# Altium PCB ISO.PcbDoc
Units mil, origin at the board's own origin, x right, y up, seen from the top; angles counter-clockwise.
Board outline 1889.76 x 1259.84 mil, 2 copper layers (Top Layer, Bottom Layer), stack 12.8 mil thick; 43 components, 25 nets, 112 pads, 358 vias.
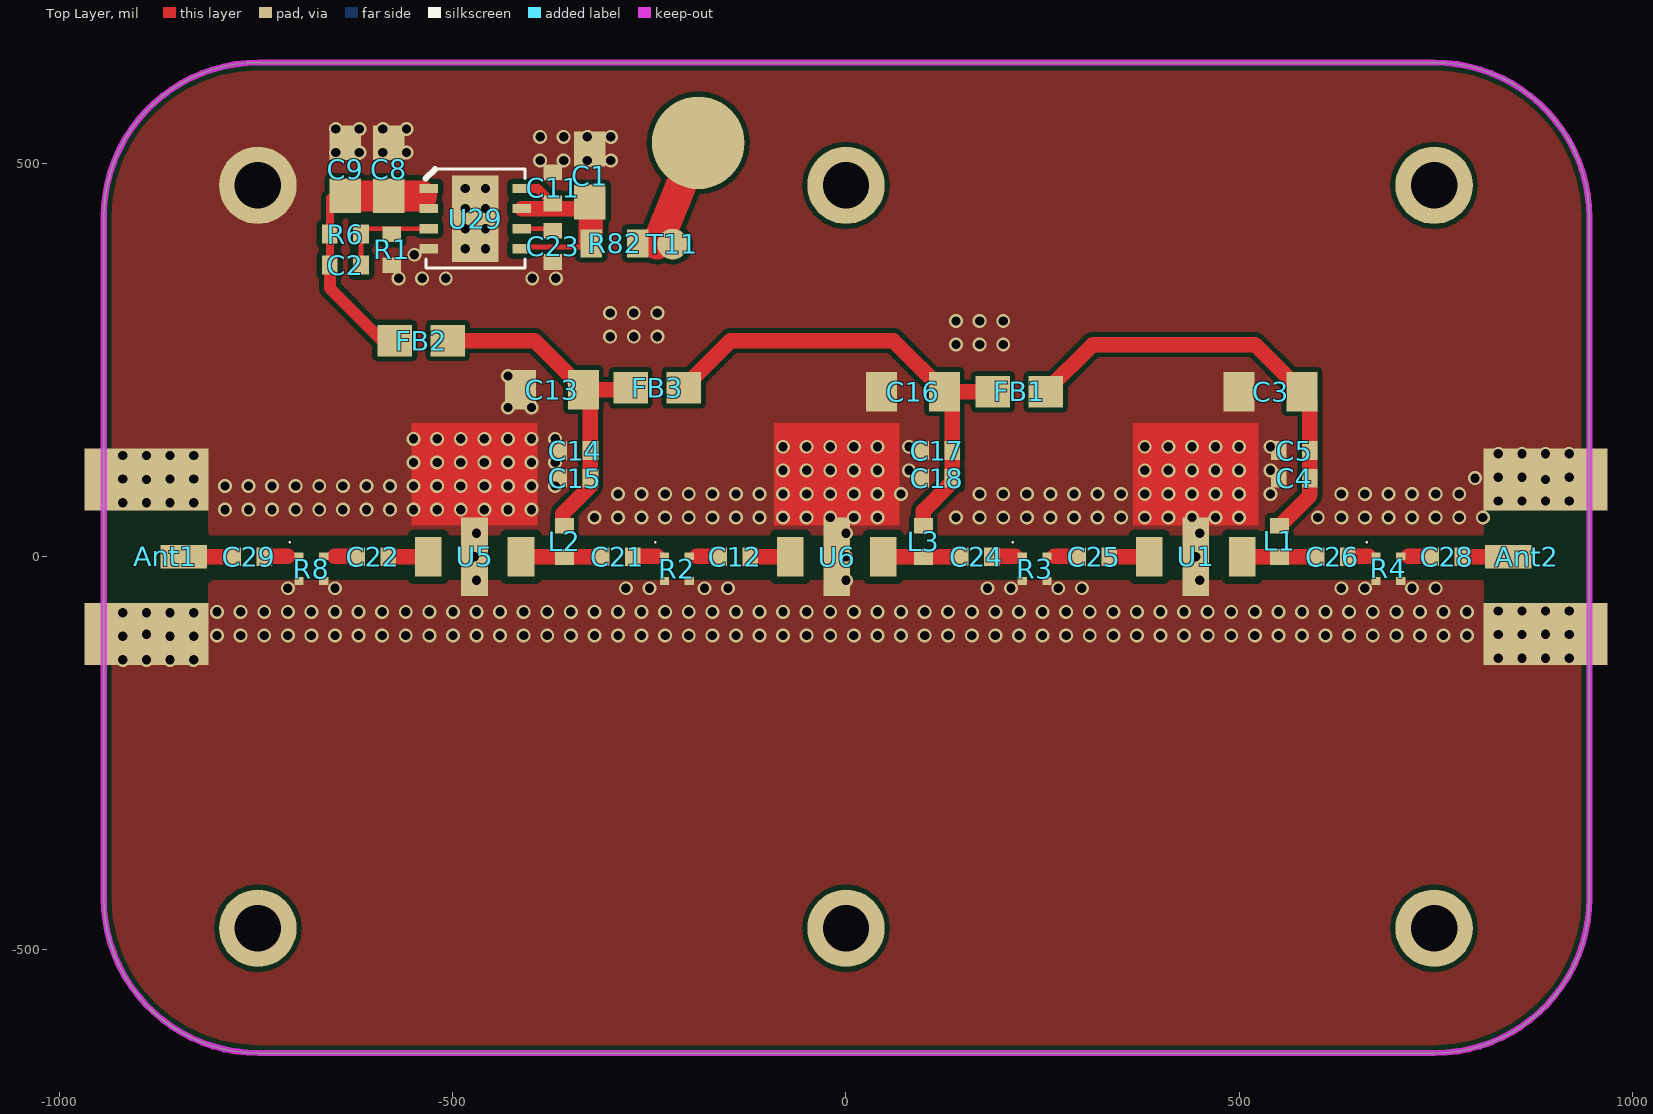
[diagram p0: Top Layer view]
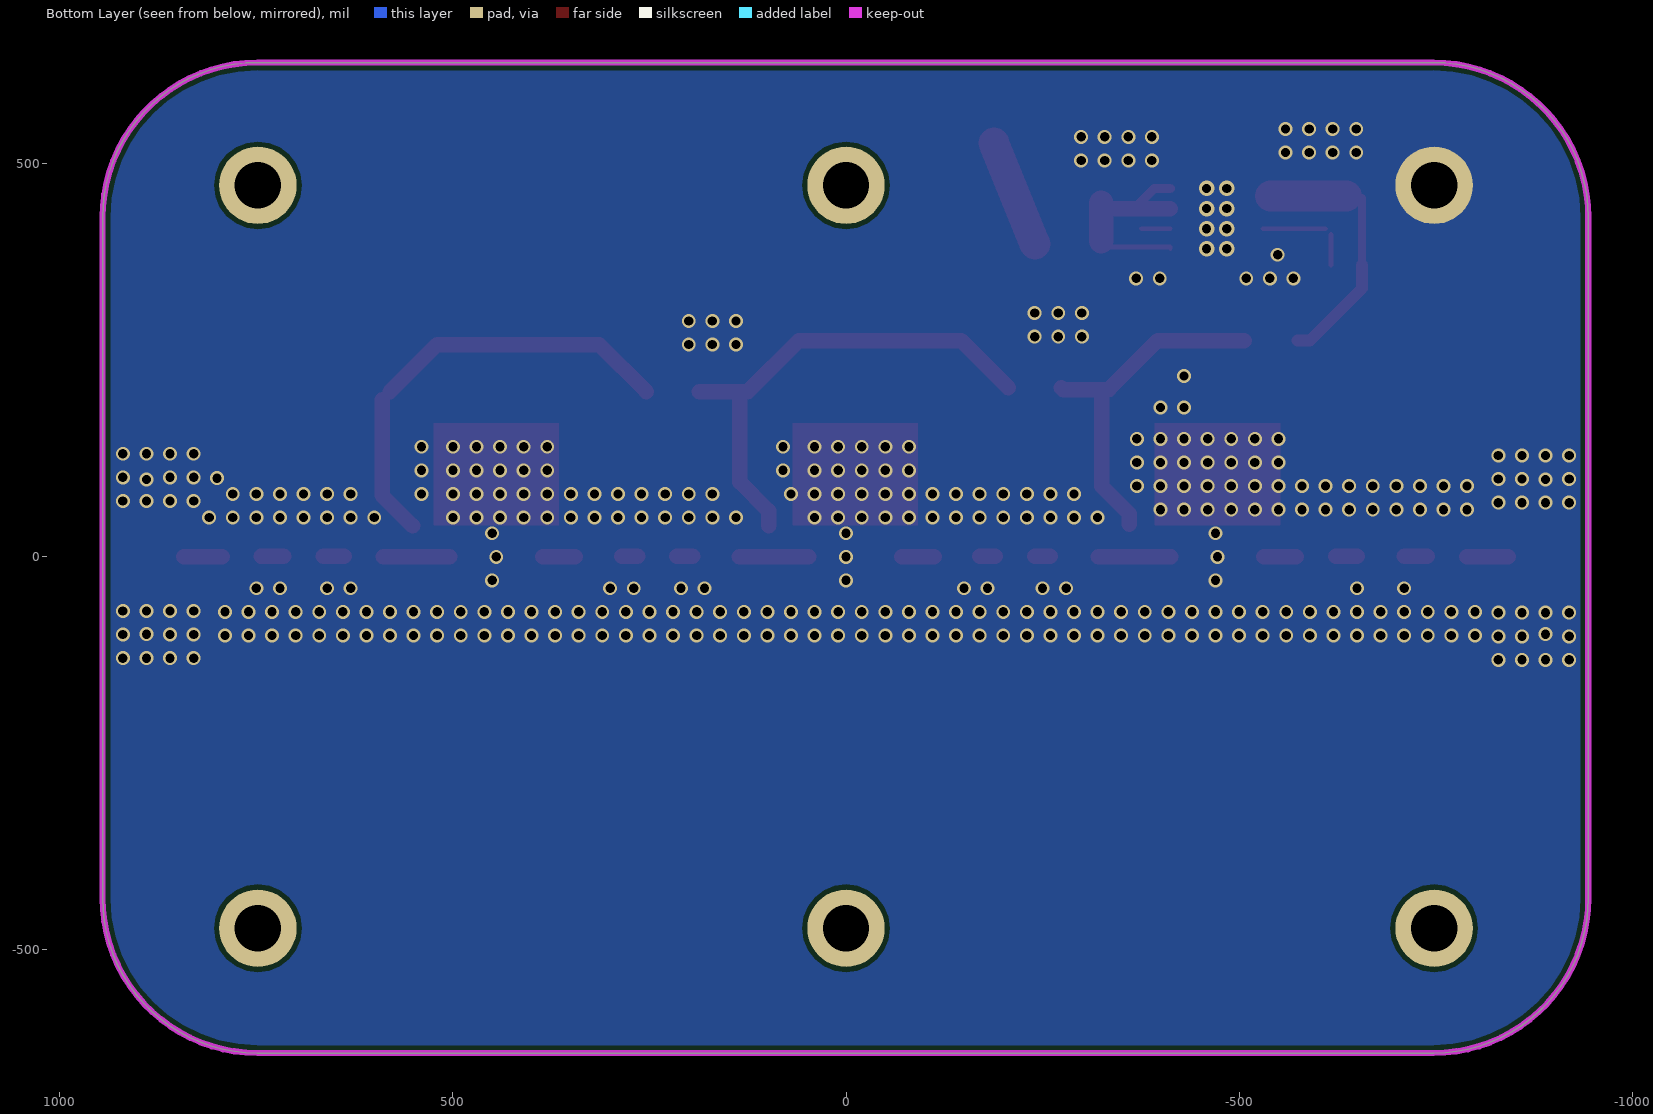
[diagram p1: Bottom Layer view, seen from below]

## Layer stack, top to bottom
Top Solder: solder mask 0.4, Solder Resist, Dk 3.5
Top Layer: signal copper 1.4
Dielectric 1: core 10, FR-4, Dk 4.2
Bottom Layer: signal copper 1.4
Bottom Solder: solder mask 0.4, Solder Resist, Dk 3.5

## Board outline
-944.21,-434.35 -944.21,431.79 cw(c-747.36,431.79) -747.36,628.64 748.7,628.64 cw(c748.7,431.79) 945.55,431.79 945.55,-434.35 cw(c748.7,-434.35) 748.7,-631.2 -747.36,-631.2 cw(c-747.36,-434.35)

## Design rules (kind name [scope] priority, off if disabled: settings)
Clearance 50R [InNetClass('50R') vs InNet('GND')] p1: gap=10 ignorepadtopadclearanceinfootprint=FALSE
Clearance Clearance_1 [(InNamedPolygon('Bottom Layer-No Net')) vs Not InNet('GND')] p2: gap=6 ignorepadtopadclearanceinfootprint=FALSE
Clearance [All] p3: gap=6 ignorepadtopadclearanceinfootprint=FALSE except(0: Arc-Hole Track-Hole SMDPad-Hole THPad-Hole Via-Hole Fill-Hole Poly-Hole Region-Hole Text-Hole)
DiffPairsRouting [All] p1: maxlimit=10 minlimit=10 mostfreqgap=10 toplayer_minwidth=5.98 toplayer_maxwidth=15 toplayer_prefwidth=15 bottomlayer_minwidth=5.98 bottomlayer_maxwidth=15 bottomlayer_prefwidth=15 maxuncoupledlength=500
HoleSize [All] p1: absolutevalues=TRUE maxlimit=120 minlimit=1 maxpercent=80.000 minpercent=20.000
MinimumSolderMaskSliver [All] p1 off: minsoldermaskwidth=10
PlaneClearance [All] p1: clearance=10
PlaneConnect [All] p1: planeconnectstyle=Direct reliefexpansion=20 reliefentries=4 reliefconductorwidth=10 reliefairgap=10
PolygonConnect [All] p1: connectstyle=Direct reliefconductorwidth=10 reliefentries=4 polygonreliefangle="90 Angle" airgapwidth=10
RoomDefinition main [InComponentClass('main')] p1 off: confinementstyle=ConfineIn formatcopy=TRUE lockcomponents=FALSE outline -7200.19,-1795.5 -4855.19,-1795.5 -4855.19,-1555.5 -7200.19,-1555.5
RoutingVias [All] p1: holewidth=12 width=20 viastyle="Through Hole" minholewidth=11.81 minwidth=19.68 maxholewidth=28 maxwidth=50
SilkToBoardRegionClearance [All] p1 off:
SilkToSilkClearance [All] p1 off: silktosilkclearance=10
SilkToSolderMaskClearance [IsPad] p1 off: minsilkscreentomaskgap=10 clearancetoexposedcopper=TRUE
SolderMaskExpansion [All] p1: expansion=4
Width [All] p1: maxlimit=60 minlimit=6 preferedwidth=6
22 further rules are at their usual default settings.

## Classes and differential pairs
net class 50R: AMP2 NetAnt1_1 NetAnt2_1 NetC12_1 NetC12_2 NetC21_1 NetC21_2 NetC22_2 NetC24_2 NetC25_1 NetC25_2 NetC26_1 NetC26_2 NetC28_1

## Components (designator, comment, footprint, x,y, rotation, side; value= is the part's Value field where it differs from the comment)
Ant1 "Antenna" SMA-2 -889.76,98.43 r270 top
Ant2 "Antenna" SMA-2 889.76,-98.43 r90 top
C1 "2.2uF" 0603 -325.79,485.24 r270 top
C2 "470nF" 0402 -636.81,371.06 r0 top
C3 "12nF" 0805 540,210 r0 top
C4 "1nF" 0402 570,100 r0 top
C5 "100pF" 0402 570,135 r0 top
C8 "0.1uF" 0603 -581.69,493.11 r270 top
C9 "2.2uF" 0603 -636.81,493.11 r270 top
C11 "0.1uF" 0402 -373.03,469.49 r270 top
C12 "1nF" 0402 -141.73,0 r0 top
C13 "12nF" 0805 -374.02,212.6 r0 top
C14 "1nF" 0402 -345,135 r0 top
C15 "100pF" 0402 -345,100 r0 top
C16 "12nF" 0805 85,210 r0 top
C17 "1nF" 0402 115,135 r0 top
C18 "100pF" 0402 115,100 r0 top
C21 "1nF" 0402 -291.34,0 r0 top
C22 "1nF" 0402 -602.36,0 r0 top
C23 "470nF" 0402 -373.03,394.69 r90 top
C24 "1nF" 0402 165.35,0 r0 top
C25 "1nF" 0402 314.96,0 r0 top
C26 "1nF" 0402 618.11,0 r0 top
C28 "1nF" 0402 763.78,0 r0 top
C29 "1nF" 0402 -759.84,0 r0 top
FB1 "FB" 0603 220,210 r0 top
FB2 "FB" 0603 -540,275 r180 top
FB3 "FB" 0603 -240,215 r180 top
L1 "Inductor" 0402 551.18,19.69 r270 top value=10nH
L2 "Inductor" 0402 -358.27,19.69 r270 top value=10nH
L3 "Inductor" 0402 98.43,19.69 r270 top value=10nH
R1 "10k" 0402 -577.76,390.75 r270 top value=0Ohm
R2 "EXB24-RF-ATT" EXB24AT-RF-ATT -215,-15 r0 top
R3 "EXB24-RF-ATT" EXB24AT-RF-ATT 240,-15 r0 top
R4 "EXB24-RF-ATT" EXB24AT-RF-ATT 690,-15 r0 top
R6 "6.25k" 0402 -636.81,410.43 r0 top value=0Ohm
R8 "EXB24-RF-ATT" EXB24AT-RF-ATT -680,-15 r0 top
R82 "FB" 0603L -294.29,398.62 r0 top value=0Ohm
T11 "TestPad" "TestPad - 1mm" -220.47,397.64 r180 top
U1 "AMP-SOT89" SOT-89 444.88,0 r0 top
U5 "AMP-SOT89" SOT-89 -472.44,0 r0 top
U6 "AMP-SOT89" SOT-89 -11.81,0 r0 top
U29 "TPS7A8101" TPS7A8101 -471.46,430.12 r0 top

## Footprints (in the part's own frame and the unit in brackets; to place one, negate y for a bottom-side part, rotate by r counter-clockwise, add the part's x,y. Pads: shape width x height; smd on the part's side, far side on the other; paste and mask are expansions set on the pad)
0402 [mil] "0402-RES"
  rect 20x24 smd: 1(-19.68,0) 2(20,0)
0603 [mil] "0603-RES"
  rect 44x40 smd: 1(-33.46,0) 2(34,0)
  body extent -31,-16 31,16, height 31
0603L [mm]
  rect 0.7x0.9 smd: 1(-0.75,0) 2(0.75,0)
  body extent -0.8,-0.4 0.8,0.4, height 0.8
0805 [mil]
  rect 39.37x50 smd: 1(-40,0) 2(40,0)
  body extent -50,-30 50,30, height 31
EXB24AT-RF-ATT [mm]
  rect 0.3x0.25 smd: 1(-0.4,-0.4) 2(0.4,-0.4) 3(0.4,0.4) 4(-0.4,0.4)
  body extent -0.5,-0.5 0.5,0.5, height 0.35
SMA-2 [mm]
  rect 0.75x1.5 smd: 1(2.5,1.2)
  rect 2x4 smd: GND(0,0) GND(5,0)
  Top Layer pour cut-out: 1,2 4,2 4,-2 1,-2
SOT-89 [mil]
  rect 34x50 smd: 1(-59.06,0) 3(59.06,0)
  rect 34x100 smd: 2(0,0)
  Top Layer region: -80,40 80,40 80,170 -80,170
  body extent -89,-22 89,147, height 59
"TestPad - 1mm" [mm]
  round 1 smd: 1(0,0)
TPS7A8101 [mm]
  rect 1.5x2.8 smd: 0(0,0)
  rect 0.6x0.3 smd: 1(-1.5,0.975) 2(-1.5,0.325) 3(-1.5,-0.325) 4(-1.5,-0.975) 5(1.5,-0.975) 6(1.5,-0.325) 7(1.5,0.325) 8(1.5,0.975)
  silkscreen extent -1.6,-1.6 1.6,1.6, body extent -1.5,-1.5 1.5,1.5, height 0.6

## Part data
C1 C3 C4 C5 C8 C9 C11 C12 C13 C14 C15 C16 C17 C18 C21 C22 C23 C24 C25 C26 C28 C29: library part CAP0402-CAP, "<b>Capacitor</b> / Standard 0603 ceramic capacitor, and 0.1\" leaded capacitor.", PARTNO=CC0402ZRY5V7BB104
C2: library part Cap, "Capacitor", LatestRevisionDate=17-Jul-2002, LatestRevisionNote="Re-released for DXP Platform.", PackageDescription="Radial Cap, Thru-Hole; 2 Leads; 0.3 in Pin Spacing", PackageReference=RAD-0.3, Published=8-Jun-2000, Publisher="Altium Limited"
FB1 FB2 FB3 R1 R6 R82: library part Res2, "Resistor", LatestRevisionDate=17-Jul-2002, LatestRevisionNote="Re-released for DXP Platform.", PackageDescription="Axial Device, Thru-Hole; 2 Leads; 0.4 in Pin Spacing", PackageReference=AXIAL-0.4, Published=8-Jun-2000, Publisher="Altium Limited"
L1 L2 L3: Code_IEC=1005, Code_JEITA=0402, LatestRevisionDate=29-May-2009, LatestRevisionNote="IPC-7351 Footprint Added.", PackageDescription="Chip Inductor", PackageReference=0402-A, Published=8-Jun-2000, Publisher="Altium Limited"

## Free pads (board coordinates)
  round 98.43 hole 59.06: 0(-748.03,-472.44) 0(-748.03,472.44) 0(0,-472.44) 0(0,472.44) 0(748.03,-472.44) 0(748.03,472.44)
  round 118.11 smd: 11(-187.99,526.58)

## Via types
v1: diameter 17.72, hole 11.81, Top Layer to Bottom Layer, tented both sides, 350 vias
v2: diameter 19.68, hole 11.81, Top Layer to Bottom Layer, tented both sides, 8 vias

## Nets (pads, with @x,y where several pads share a name; then routed paths per layer and width w, separated by ;. In a path a pad name is that pad's centre, name@x,y a point inside that pad or via, vN(x,y) a via of type N, cw(c..) or ccw(c..) an arc to the next point about the centre after c; other vN are vias at no path point)
5V: C2.1 C8.2 C9.2 FB2.2 R6.1 U29.1 U29.2 | length 321.9
  Top Layer w10: C2.1 R6.1 C9.2@-656.5,456.55
  Top Layer w15: C2.1 -656.5,341.5 -590,275 FB2.2
  Top Layer w39.37: C9.2 C8.2 -540.06,459.11
5V-2: C16.2 C17.2 C18.2 FB1.1 FB3.1 L3.1 | length 620.6
  Top Layer w19.68: FB3.1 -146.54,275 60,275 C16.2 FB1.1 ; L3.1 98.43,58.43 135,95 C18.2 C17.2 C16.2@135,200
AMP2: C24.1 L3.2 U6.3 | length 88.6
  Top Layer w19.68: U6.3 C24.1@135.83,0
GND: Ant1.GND Ant2.GND C1.1 C3.1 C4.1 C5.1 C8.1 C9.1 C11.1 C13.1 C14.1 C15.1 C16.1 C17.1 C18.1 C23.1 pad.0@-748.03,472.44 R1.2 R2.1 R2.2 R3.1 R3.2 R4.1 R4.2 R8.1 R8.2 U1.2 U5.2 U6.2 U29.0 U29.4
  other v1: -919.76,-131.1 -889.76,-131.1 -859.76,-131.1 -829.76,-131.1 829.76,-128.9 859.76,-128.9 889.76,-128.9 919.76,-128.9 -919.76,-101.1 -859.76,-101.1 -829.76,-101.1 -800,-100 -770,-100 -740,-100 -710,-100 -680,-100 -650,-100 -620,-100 -590,-100 -560,-100 -530,-100 -500,-100 -470,-100 -440,-100 -410,-100 -380,-100 -350,-100 -320,-100 -290,-100 -260,-100 -230,-100 -200,-100 -170,-100 -140,-100 -110,-100 -80,-100 -50,-100 -20,-100 10,-100 40,-100 70,-100 100,-100 130,-100 160,-100 190,-100 220,-100 250,-100 280,-100 310,-100 340,-100 370,-100 400,-100 430,-100 460,-100 490,-100 520,-100 550,-100 580,-100 610,-100 640,-100 670,-100 700,-100 730,-100 760,-100 790,-100 -889.76,-98.43 829.76,-98.9 859.76,-98.9 889.76,-98.43 919.76,-98.9 -919.76,-71.1 -889.76,-71.1 -859.76,-71.1 -829.76,-71.1 -800,-70 -770,-70 -740,-70 -710,-70 -680,-70 -650,-70 -620,-70 -590,-70 -560,-70 -530,-70 -500,-70 -470,-70 -440,-70 -410,-70 -380,-70 -350,-70 -320,-70 -290,-70 -260,-70 -230,-70 -200,-70 -170,-70 -140,-70 -110,-70 -80,-70 -50,-70 -20,-70 10,-70 40,-70 70,-70 100,-70 130,-70 160,-70 190,-70 220,-70 250,-70 280,-70 310,-70 340,-70 370,-70 400,-70 430,-70 460,-70 490,-70 520,-70 550,-70 580,-70 610,-70 640,-70 670,-70 700,-70 730,-70 760,-70 790,-70 829.76,-68.9 859.76,-68.9 889.76,-68.9 919.76,-68.9 -710,-40 -650,-40 -280,-40 -250,-40 -180,-40 -150,-40 180,-40 210,-40 270,-40 300,-40 630,-40 660,-40 720,-40 750,-40 -470,-30 0,-30 450,-30 -472.44,0 0,0 444.88,0 -470,30 0,30 450,30 -320,50 -290,50 -260,50 -230,50 -200,50 -170,50 -140,50 -110,50 -80,50 -50,50 -20,50 10,50 40,50 140,50 170,50 200,50 230,50 260,50 290,50 320,50 350,50 380,50 410,50 440,50 470,50 500,50 600,50 630,50 660,50 690,50 720,50 750,50 780,50 810,50 -790,60 -760,60 -730,60 -700,60 -670,60 -640,60 -610,60 -580,60 -550,60 -520,60 -490,60 -460,60 -430,60 -400,60 -919.76,68.9 -889.76,68.9 -859.76,68.9 -829.76,68.9 829.76,71.1 859.76,71.1 889.76,71.1 919.76,71.1 -290,80 -260,80 -230,80 -200,80 -170,80 -140,80 -110,80 -80,80 -50,80 -20,80 10,80 40,80 70,80 170,80 200,80 230,80 260,80 290,80 320,80 350,80 380,80 410,80 440,80 470,80 500,80 540,80 630,80 660,80 690,80 720,80 750,80 780,80 -790,90 -760,90 -730,90 -700,90 -670,90 -640,90 -610,90 -580,90 -550,90 -520,90 -490,90 -460,90 -430,90 -400,90 -370,90 -919.76,98.9 -889.76,98.43 -859.76,98.9 -829.76,98.9 889.76,98.43 800,100 829.76,101.1 859.76,101.1 919.76,101.1 -80,110 -50,110 -20,110 10,110 40,110 80,110 380,110 410,110 440,110 470,110 500,110 540,110 -550,120 -520,120 -490,120 -460,120 -430,120 -400,120 -370,120 -919.76,128.9 -889.76,128.9 -859.76,128.9 -829.76,128.9 829.76,131.1 859.76,131.1 889.76,131.1 919.76,131.1 -80,140 -50,140 -20,140 10,140 40,140 80,140 380,140 410,140 440,140 470,140 500,140 540,140 -550,150 -520,150 -490,150 -460,150 -430,150 -400,150 -370,150 -430,190 -400,190 -430,230 140,270 170,270 200,270 -300,280 -270,280 -240,280 140,300 170,300 200,300 -300,310 -270,310 -240,310 -569.06,354.17 -539.06,354.17 -509.06,354.17 -399.06,354.17 -369.06,354.17 -549.06,384.17 -389.06,504.17 -359.06,504.17 -329.06,504.17 -299.06,504.17 -649.06,514.17 -619.06,514.17 -589.06,514.17 -559.06,514.17 -389.06,534.17 -359.06,534.17 -329.06,534.17 -299.06,534.17 -649.06,544.17 -619.06,544.17 -589.06,544.17 -559.06,544.17
  other v2: -484.25,391.73 -458.66,391.73 -484.25,417.32 -458.66,417.32 -484.25,442.91 -458.66,442.91 -484.25,468.5 -458.66,468.5
NetAnt1_1: Ant1.1 C29.1 | length 53.1
  Top Layer w19.68: Ant1.1 C29.1@-789.37,0
NetAnt2_1: Ant2.1 C28.2 | length 49.2
  Top Layer w19.68: C28.2@793.31,0 Ant2.1
NetC1_2: C1.2 C11.2 R82.1 U29.5 U29.7 U29.8 | length 256.5
  Top Layer w6: U29.5 -412.4,394 R82.1@-332.38,394
  Top Layer w11.81: U29.8 -392.05,468.5 C11.2
  Top Layer w19.68: U29.7 C1.2@-334.11,442.91
  Top Layer w31.5: R82.1@-324.8,401.57 C1.2@-324.8,450.25
NetC2_2: C2.2 R1.1 R6.2 U29.3 | length 118.8
  Top Layer w6: C2.2 R6.2 ; R6.2@-609.92,417.32 U29.3
NetC3_2: C3.2 C4.2 C5.2 FB1.2 L1.1 | length 552.4
  Top Layer w19.68: FB1.2 314,270 520,270 C3.2 ; L1.1 590,78.19 C4.2 C5.2 C3.2@590,200
NetC12_1: C12.1 R2.3 | length 20
  Top Layer w19.68: -190,0.75 C12.1@-170,0.75
NetC12_2: C12.2 U6.1 | length 41.3
  Top Layer w19.68: C12.2@-112.2,0 U6.1
NetC13_2: C13.2 C14.2 C15.2 FB2.1 FB3.2 L2.1 | length 436.4
  Top Layer w19.68: FB2.1 -396.42,275 C13.2 -276.4,212.6 FB3.2 ; L2.1@-360,41.1 -360,55 -325,90 C15.2 C14.2 C13.2@-325,203.58
NetC21_1: C21.1 L2.2 U5.3 | length 92.5
  Top Layer w19.68: U5.3 C21.1@-320.87,0
NetC21_2: C21.2 R2.4 | length 20
  Top Layer w19.68: -260,0.75 -240,0.75
NetC22_1: C22.1 R8.3 | length 27.2
  Top Layer w19.68: -650,0.75 C22.1@-622.8,0.75
NetC22_2: C22.2 U5.1 | length 41.3
  Top Layer w19.68: C22.2@-572.83,0 U5.1
NetC23_2: C23.2 U29.6 | length 36.7
  Top Layer w6: U29.6 C23.2@-375.67,417.32
NetC24_2: C24.2 R3.4 | length 20
  Top Layer w19.68: C24.2@195,0.75 215,0.75
NetC25_1: C25.1 R3.3 | length 20
  Top Layer w19.68: 265,0.75 285,0.75
NetC25_2: C25.2 U1.1 | length 41.3
  Top Layer w19.68: C25.2@344.49,0 U1.1
NetC26_1: C26.1 L1.2 U1.3 | length 84.6
  Top Layer w19.68: U1.3 C26.1@588.58,0
NetC26_2: C26.2 R4.4 | length 26.9
  Top Layer w19.68: C26.2@638.11,0.75 665,0.75
NetC28_1: C28.1 R4.3 | length 29.1
  Top Layer w19.68: 715,0.75 C28.1@744.09,0.75
NetC29_2: C29.2 R8.4 | length 29.1
  Top Layer w19.68: C29.2@-739.09,0.75 -710,0.75
NetR82_2: pad.11 R82.2 T11.1 | length 139.1
  Top Layer w39.37: -240.16,397.64 pad.11

## Polygon pours and split planes (outlines as drawn)
GND on Top Layer "GND_L01_P004" (solid, remove dead copper, pour order 4): -944.21,-434.35 -944.21,431.79 cw(c-747.36,431.79) -747.36,628.64 748.7,628.64 cw(c748.7,431.79) 945.55,431.79 945.55,-434.35 cw(c748.7,-434.35) 748.7,-631.2 -747.36,-631.2 cw(c-747.36,-434.35)
GND on Bottom Layer "GND_L02_P006" (solid, remove dead copper, pour order 6): -944.21,-434.35 -944.21,431.79 cw(c-747.36,431.79) -747.36,628.64 748.7,628.64 cw(c748.7,431.79) 945.55,431.79 945.55,-434.35 cw(c748.7,-434.35) 748.7,-631.2 -747.36,-631.2 cw(c-747.36,-434.35)

## Keep-outs
Keep-Out Layer:
  the board outline again, w7.87

## Other copper
Top Layer:
  pour cut-out: -810,27.14 810,27.14 810,-30 -810,-30

## Silkscreen, mask and mechanical layers (free items; w line width, h text height)
Top Solder:
  rectangle: -320,270 -220,330
  rectangle: 120,260 220,320
Mechanical 1:
  lines w0.5: 959.84,-25.98 959.48,-23.93 959.15,-21.87 958.88,-20.06 958.65,-18.39 958.46,-16.82 958.29,-15.36 958.15,-13.99 958.02,-12.67 957.91,-11.4 957.82,-10.18 957.74,-9.02 957.68,-7.9 957.62,-6.79 957.58,-5.72 957.54,-4.66 957.51,-3.64 957.49,-2.63 957.48,-1.67 957.48,-0.71 957.48,-0.16 957.5,1.66 957.55,3.37 957.61,4.99 957.68,6.5 957.77,7.96 957.87,9.37 957.98,10.73 958.1,12.04 958.23,13.29 958.36,14.5 958.51,15.71 958.65,16.86 958.81,18.02 958.97,19.12 959.13,20.23 959.3,21.28 959.47,22.33 959.66,23.39 959.84,24.44
Mechanical 3:
  lines w0.5: -1113.51,-690.25 -1082.01,-690.25 -983.58,-690.25 ; -1113.51,687.7 -1082.01,687.7 -983.58,687.7 ; -983.58,-820.17 -983.58,-788.68 -983.58,-690.25 ; -983.58,-560.33 -983.58,-591.83 -983.58,-690.25 ; -983.58,557.78 -983.58,589.27 -983.58,687.7 ; -983.58,817.62 -983.58,786.12 -983.58,687.7 ; -877.29,-473.72 -845.79,-473.72 -747.36,-473.72 ; -877.29,471.16 -845.79,471.16 -747.36,471.16 ; -853.66,-690.25 -885.16,-690.25 -983.58,-690.25 ; -853.66,687.7 -885.16,687.7 -983.58,687.7 ; -747.36,-603.64 -747.36,-572.14 -747.36,-473.72 ; -747.36,-343.8 -747.36,-375.29 -747.36,-473.72 ; -747.36,341.24 -747.36,372.74 -747.36,471.16 ; -747.36,601.09 -747.36,569.59 -747.36,471.16 ; -617.44,-473.72 -648.94,-473.72 -747.36,-473.72 ; -617.44,471.16 -648.94,471.16 -747.36,471.16 ; -129.25,-690.25 -97.76,-690.25 0.67,-690.25 ; -129.25,-473.72 -97.76,-473.72 0.67,-473.72 ; -129.25,471.16 -97.76,471.16 0.67,471.16 ; -129.25,687.7 -97.76,687.7 0.67,687.7 ; 0.67,-820.17 0.67,-788.68 0.67,-690.25 ; 0.67,-603.64 0.67,-572.14 0.67,-473.72 ; 0.67,-560.33 0.67,-591.83 0.67,-690.25 ; 0.67,-343.8 0.67,-375.29 0.67,-473.72 ; 0.67,341.24 0.67,372.74 0.67,471.16 ; 0.67,557.78 0.67,589.27 0.67,687.7 ; 0.67,601.09 0.67,569.59 0.67,471.16 ; 0.67,817.62 0.67,786.12 0.67,687.7 ; 130.59,-690.25 99.09,-690.25 0.67,-690.25 ; 130.59,-473.72 99.09,-473.72 0.67,-473.72 ; 130.59,471.16 99.09,471.16 0.67,471.16 ; 130.59,687.7 99.09,687.7 0.67,687.7 ; 618.78,-473.72 650.27,-473.72 748.7,-473.72 ; 618.78,471.16 650.27,471.16 748.7,471.16 ; 748.7,-603.64 748.7,-572.14 748.7,-473.72 ; 748.7,-343.8 748.7,-375.29 748.7,-473.72 ; 748.7,341.24 748.7,372.74 748.7,471.16 ; 748.7,601.09 748.7,569.59 748.7,471.16 ; 855,-690.25 886.49,-690.25 984.92,-690.25 ; 855,687.7 886.49,687.7 984.92,687.7 ; 878.62,-473.72 847.12,-473.72 748.7,-473.72 ; 878.62,471.16 847.12,471.16 748.7,471.16 ; 984.92,-820.17 984.92,-788.68 984.92,-690.25 ; 984.92,-560.33 984.92,-591.83 984.92,-690.25 ; 984.92,557.78 984.92,589.27 984.92,687.7 ; 984.92,817.62 984.92,786.12 984.92,687.7 ; 1114.84,-690.25 1083.34,-690.25 984.92,-690.25 ; 1114.84,687.7 1083.34,687.7 984.92,687.7